# Altium PCB AIRZAI_LED_SENSE_FLEX_REVB.PcbDoc (part 1 of 2)
Units mil, origin at the board's own origin, x right, y up, seen from the top; angles counter-clockwise.
Board outline 2713.44 x 4393.69 mil, 2 copper layers (Top Layer, Bottom Layer); 53 components, 36 nets, 162 pads, 79 vias.
Unrouted connection lines stored in the file: 83.
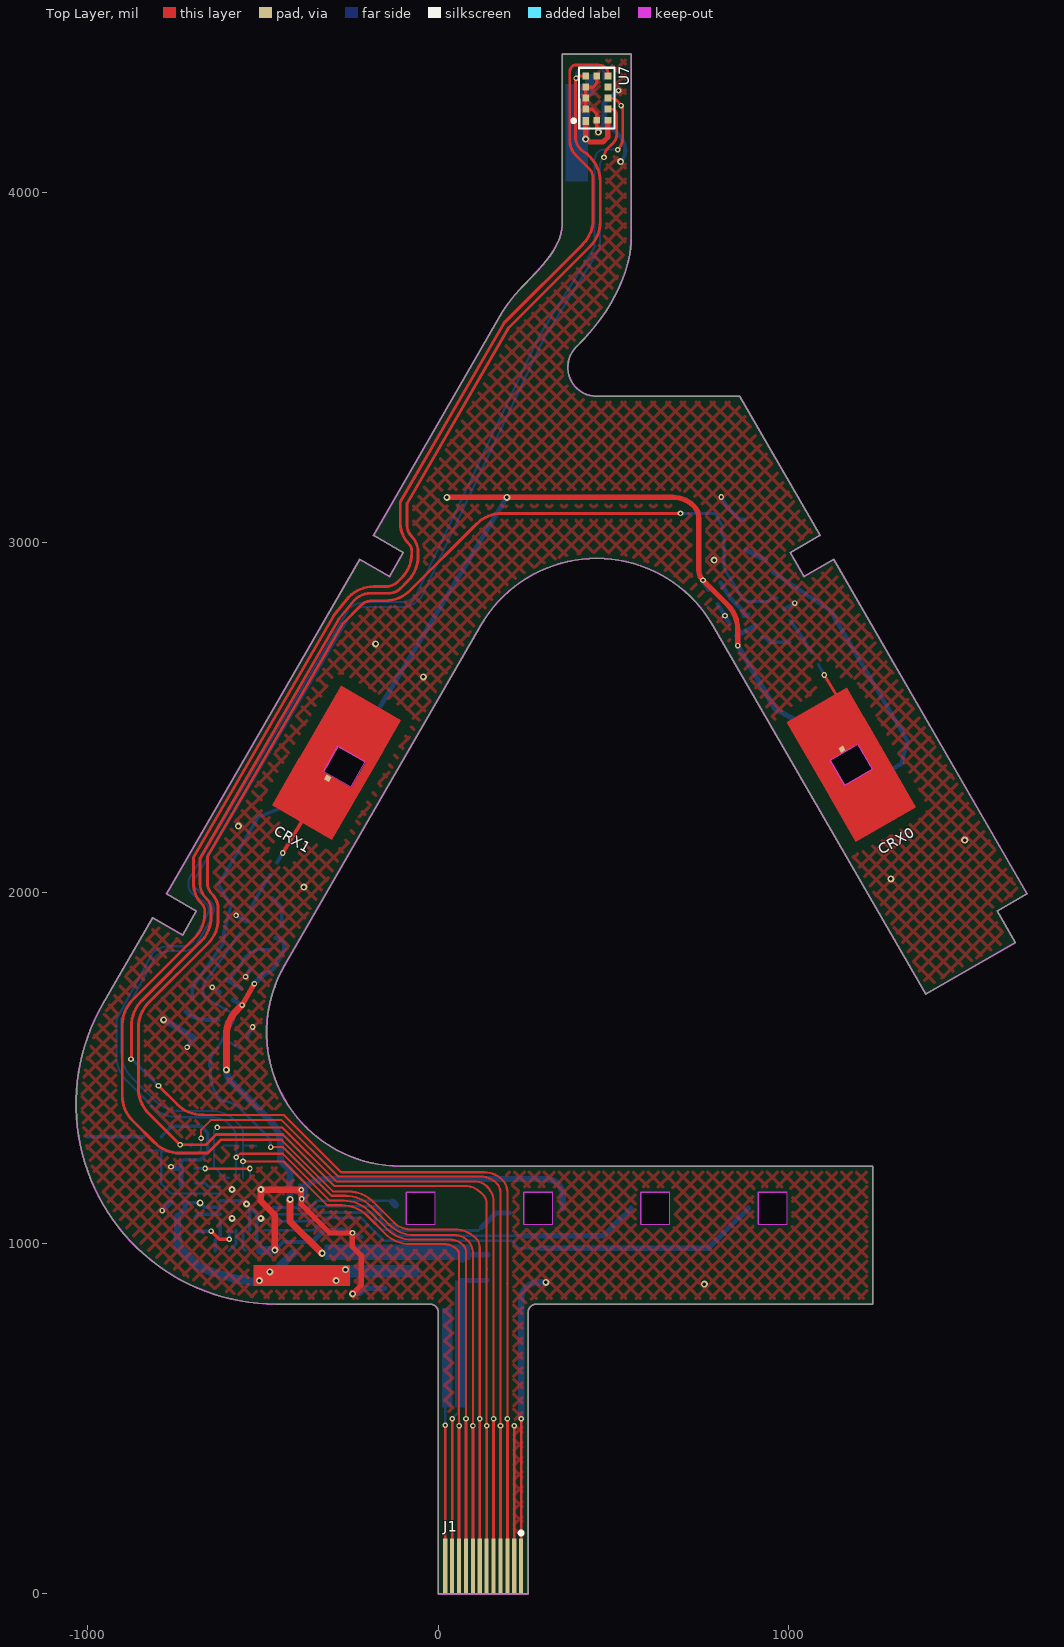
[diagram p0: Top Layer view]
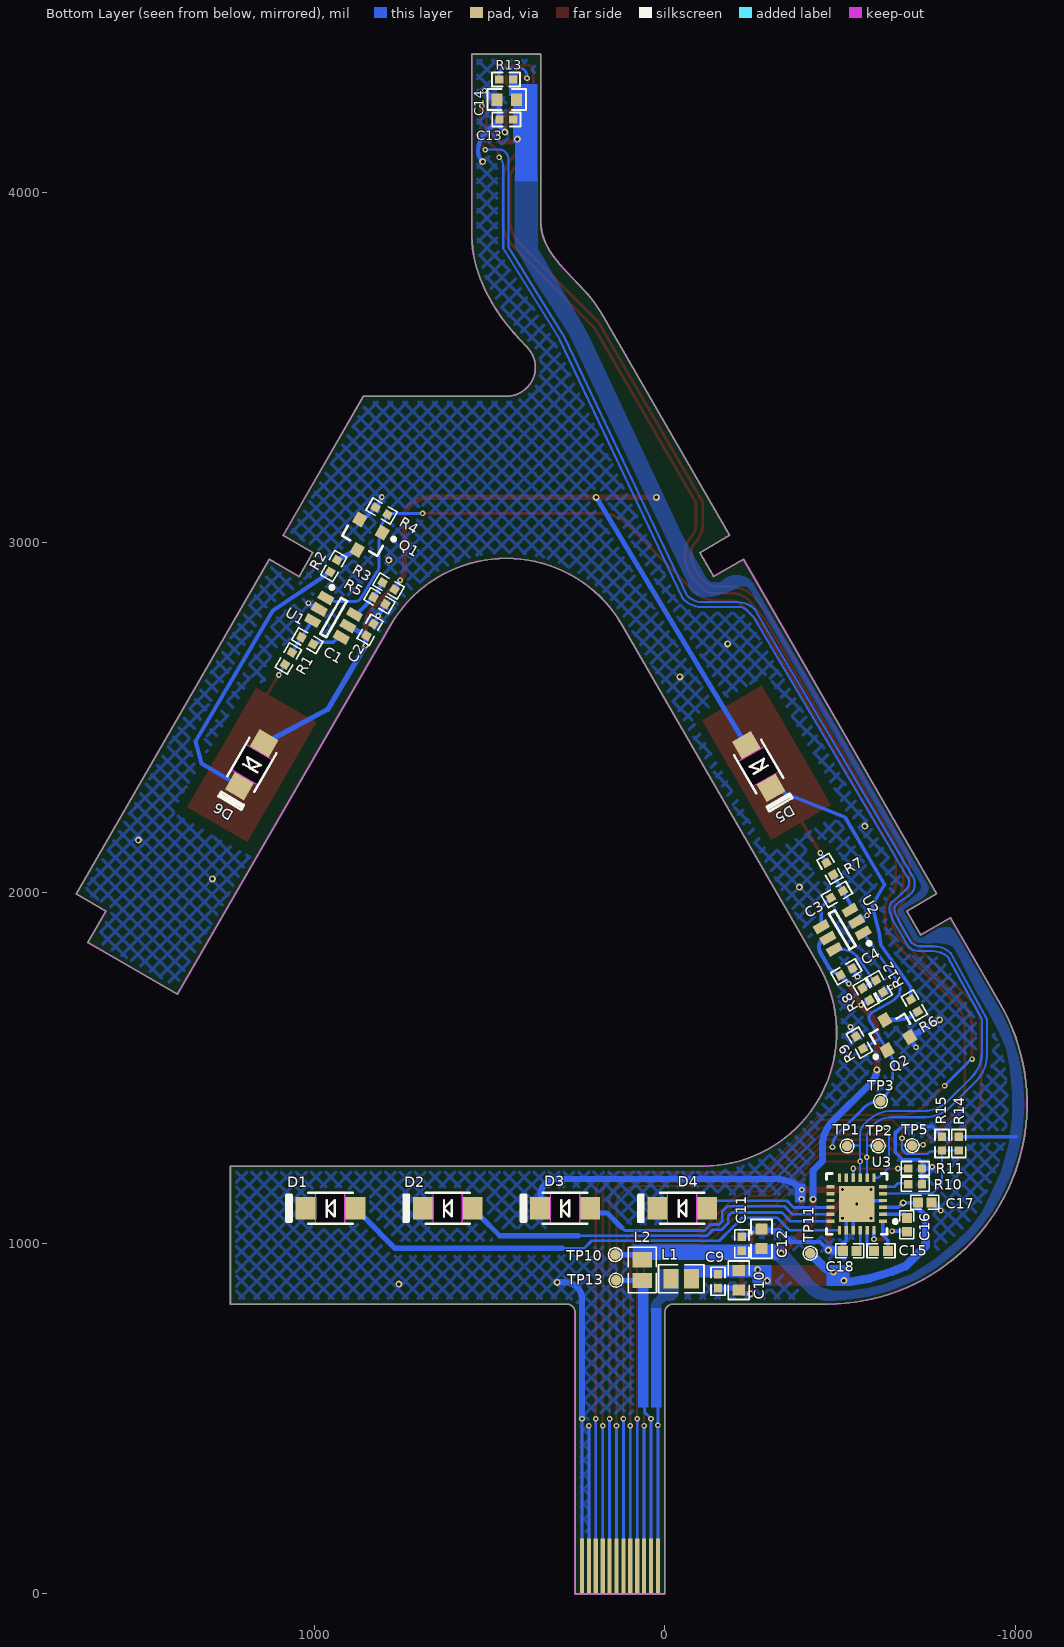
[diagram p1: Bottom Layer view, seen from below]
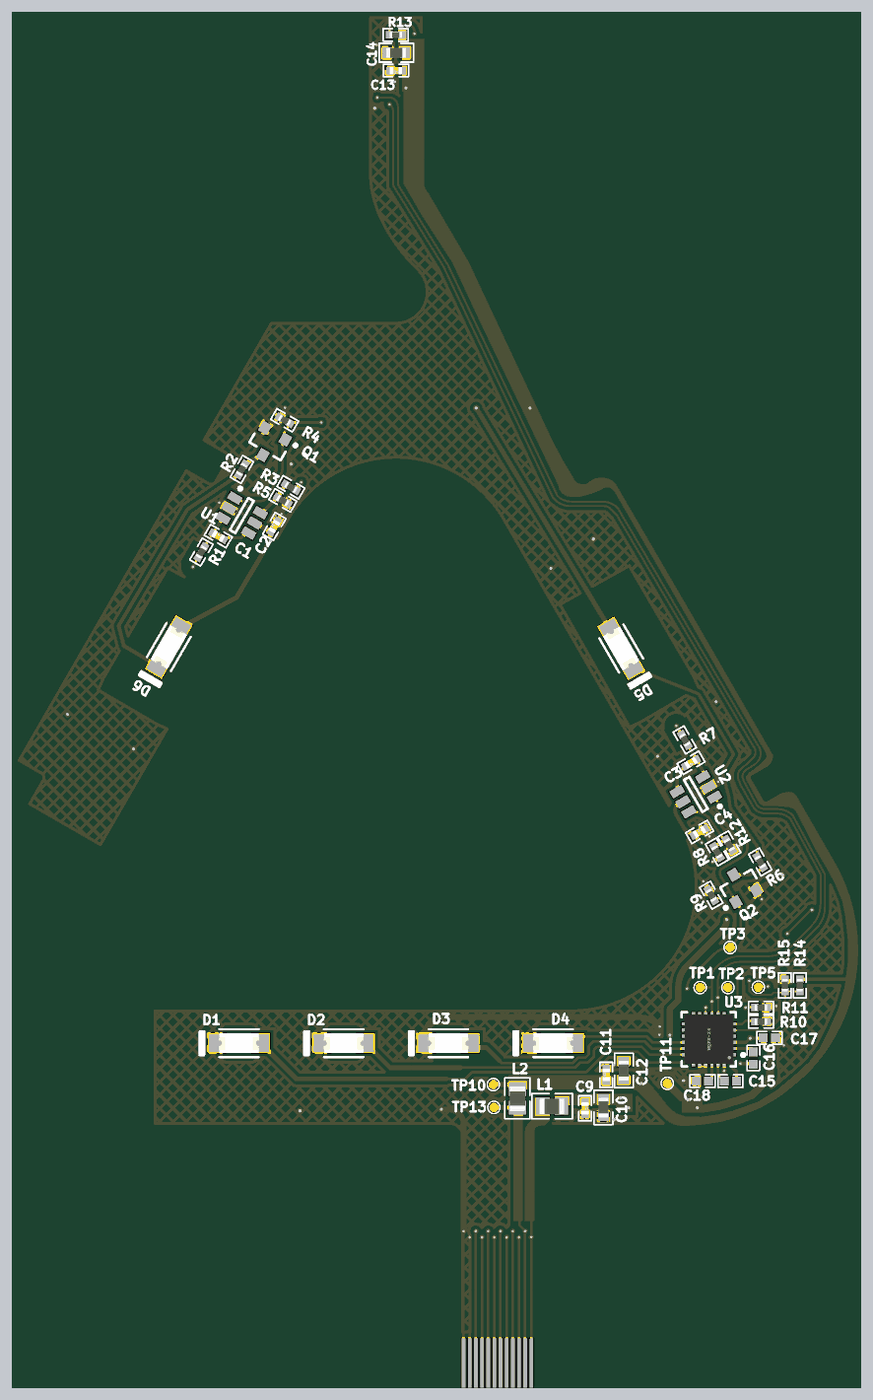
[diagram p3: 3D render of the assembled board from below, using the file's embedded part models]

## Layer stack, top to bottom
Top Solder: solder mask 0.4, Solder Resist, Dk 3.5
Top Layer: signal copper 1.4
Dielectric 1: dielectric 12.6, FR-4, Dk 4.8
Bottom Layer: signal copper 1.4
Bottom Solder: solder mask 0.4, Solder Resist, Dk 3.5

## Board outline
-463,826.78 cw(c-462.98,1397.65) -957.36,1683.09 -815.14,1929.41 -729.91,1880.19 -690.53,1948.38 -775.77,1997.6 -224.58,2952.23 -139.35,2903.01 -99.97,2971.2 -185.21,3020.41 182.62,3657.47 cw(c465.09,3488.64) 220.1,3708.36 cw(c839.65,3165.01) 242.17,3732.54 264.96,3756.39 ccw(c-627.68,4615.35) 287.35,3780.27 ccw(c-93.59,4128.16) 308.19,3804.57 ccw(c73.79,3993.55) 326.37,3829.65 ccw(c158.18,3938.86) 340.75,3855.9 ccw(c204.05,3917.92) 350.2,3883.68 ccw(c222.06,3913.41) 353.61,3913.38 353.61,3952.75 353.61,4393.69 550.46,4393.69 550.46,3952.74 550.46,3874 cw(c239.31,3875.17) 542.24,3804.11 cw(c183.5,3887.15) 532.52,3769.79 cw(c138.88,3902.12) 519.55,3736.13 cw(c91.77,3922.61) 503.7,3703.33 cw(c24.31,3959.43) 464.84,3641.1 cw(c-49.74,4012.89) 394.16,3559.04 ccw(c452.02,3499.99) 452.02,3417.31 860.08,3417.3 1089.23,3020.38 1003.99,2971.17 1043.36,2902.98 1128.6,2952.19 1679.74,1997.53 1594.5,1948.32 1646.29,1858.61 1390.38,1711.31 782.73,2763.85 ccw(c452,2572.92) 121.28,2763.87 -439.1,1793.32 ccw(c-108.38,1602.36) -108.39,1220.47 1239.37,1220.44 1239.37,826.77 279.66,826.77 ccw(c279.78,802.89) 255.91,802.77 255.91,0 0,0 0,802.41 ccw(c-23.88,802.89) -23.39,826.77
cut-out: 912.59,1055.11 995.26,1055.11 995.26,1145.66 912.59,1145.66
cut-out: 577.94,1055.12 660.62,1055.12 660.62,1145.67 577.94,1145.67
cut-out: 243.3,1055.12 325.97,1055.12 325.97,1145.67 243.3,1145.67
cut-out: -91.36,1055.12 -8.68,1055.12 -8.68,1145.67 -91.36,1145.67
cut-out: 1159.59,2307.55 1118.49,2378.93 1196.97,2424.11 1238.06,2352.73
cut-out: -327.65,2347.93 -249.18,2302.74 -208.08,2374.12 -286.55,2419.3

## Design rules (kind name [scope] priority, off if disabled: settings)
Clearance Clearance_Board_Cutout_Electrodes [(InComponent('CRX0') OR InComponent('CRX1')) vs OnLayer('Multi-Layer')] p1: gap=0 ignorepadtopadclearanceinfootprint=FALSE
Clearance Clearance_Board_Cutout_Diodes [(InComponent('D1') OR InComponent('D2') OR InComponent('D3') OR InComponent('D4') OR InComponent('D5') OR InComponent('D6')) vs OnLayer('Multi-Layer')] p2: gap=0 ignorepadtopadclearanceinfootprint=FALSE
Clearance Clearance_Keepout [(OnLayer('Keep-Out Layer')) vs (InComponent('D1') OR InComponent('D2') OR InComponent('D3') OR InComponent('D4') OR InComponent('D5') OR InComponent('D6') OR InComponent('CRX0') OR InComponent('CRX1') OR InComponent('J1'))] p3: gap=0 ignorepadtopadclearanceinfootprint=FALSE
Clearance Clearance_GND_POLY_ELECTRODE [(InComponent('CRX0') OR InComponent('CRX1') OR InComponent('CRX2') OR InNet('NetCRX0_1') OR InNet('NetCRX1_1') OR InNet('NetCRX2_1') OR InNet('NetR4_2') OR InNet('NetR2_1') OR InNet('NetR1_1')) vs (InNet('GND') AND InPolygon)] p4: gap=30 ignorepadtopadclearanceinfootprint=FALSE
Clearance Clearance_POLYGON_KEEPOUT [(OnLayer('Keep-Out Layer')) vs (InNet('GND') AND InPolygon)] p5: gap=10 ignorepadtopadclearanceinfootprint=FALSE
Clearance Clearance_GND_POLY_REST [All vs (InNet('GND') AND InPolygon)] p6: gap=10 ignorepadtopadclearanceinfootprint=FALSE
Clearance [All] p7: gap=6 ignorepadtopadclearanceinfootprint=FALSE
MinimumSolderMaskSliver [All] p1: minsoldermaskwidth=1
PolygonConnect [All] p1: connectstyle=Direct reliefconductorwidth=10 reliefentries=4 polygonreliefangle="90 Angle" airgapwidth=10
RoomDefinition AIRZAI_LED_SENSE_FLEX_REVB [InComponentClass('AIRZAI_LED_SENSE_FLEX_REVB')] p1: confinementstyle=ConfineIn formatcopy=TRUE lockcomponents=FALSE outline -3892.14,-2713.97 10767.86,-2713.97 10767.86,6886.03 -3892.14,6886.03
RoutingVias [All] p1: holewidth=28 width=50 viastyle="Through Hole" minholewidth=8 minwidth=16 maxholewidth=28 maxwidth=50
SilkToSilkClearance [All] p1: silktosilkclearance=1
SilkToSolderMaskClearance [IsPad] p1: minsilkscreentomaskgap=2 clearancetoexposedcopper=TRUE
SolderMaskExpansion [All] p1: expansion=4
UnRoutedNet [All] p1: checkbadconnections=TRUE
Width [All] p1: maxlimit=100 minlimit=6 preferedwidth=10
26 further rules are at their usual default settings.

## Components (designator, comment, footprint, x,y, rotation, side; value= is the part's Value field where it differs from the comment)
C1 "22nF" 0402CAP 1020,2720 r210 bottom
C2 "0.1µF" 0402CAP 841,2751 r120 bottom
C3 "22nF" 0402CAP -491,1996 r330 bottom
C4 "0.1µF" 0402CAP -518.16,1775.08 r150 bottom
C9 "0.1µF" 0402CAP -152,892.17 r270 bottom
C10 "10µF" 0603 -211,895 r270 bottom
C11 "0.1µF" 0402CAP -220,999.22 r90 bottom
C12 "10µF" 0603 -276,1013 r90 bottom
C13 "0.1µF" 0402CAP 452.01,4207.25 r0 bottom
C14 "4.7µF" 0603 451,4264 r180 bottom
C15 "CAP 1uF 16V 0402(1005)" CAPC0402(1005)60_M -616.69,979 r0 bottom value=1uF
C16 "CAP 1uF 16V 0402(1005)" CAPC0402(1005)60_M -690.55,1053.06 r270 bottom value=1uF
C17 "CAP 1uF 16V 0402(1005)" CAPC0402(1005)60_M -741.73,1117.23 r0 bottom value=1uF
C18 "CAP 1uF 16V 0402(1005)" CAPC0402(1005)60_M -527.69,979 r0 bottom value=1uF
CRX0 "CONTACT POINT 1" "CONTACT_POINT_1CM _SQ - duplicate" 1178.28,2365.83 r300 top
CRX1 "CONTACT POINT 1" "CONTACT_POINT_1CM _SQ" -290.35,2372.21 r60 top
D1 "WHITE" LED1206_LTW-C230DS 953.93,1100.39 r0 bottom locked
D2 "WHITE" LED1206_LTW-C230DS 619.28,1100.4 r0 bottom locked
D3 "WHITE" LED1206_LTW-C230DS 284.63,1100.41 r0 bottom locked
D4 "WHITE" LED1206_LTW-C230DS -50.03,1100.42 r0 bottom
D5 "WHITE" LED1206_LTW-C230DS -267.86,2361.02 r240 bottom
D6 "WHITE" LED1206_LTW-C230DS 1178.28,2365.83 r300 bottom
J1 "FFC Pads" FFC_PADS 127.95,78.74 r0 top locked
L1 "CB2012T100KR" 0805 -47,899 r180 bottom value=10uH
L2 "CB2012T100KR" 0805 64,924 r90 bottom value=10uH
Q1 "NTR4003NT1G" SOT-23-3-NTR4003NT1G 858,3013 r300 bottom
Q2 "NTR4003NT1G" SOT-23-3-NTR4003NT1G -647,1604 r60 bottom
R1 "10k 0402(1005)" 0402 1074,2669 r300 bottom value=10k
R2 "100R 0402(1005)" 0402 944.64,2933 r300 bottom value=100
R3 "Jumper 0402(1005)" 0402 788.11,2876 r210 bottom value=0R
R4 "DNP 0402(1005)" 0402 808,3090 r30 bottom value=DNP
R5 "DNP 0402(1005)" 0402 814,2834 r210 bottom value=DNP
R6 "100R 0402(1005)" 0402 -712,1679.08 r60 bottom value=100
R7 "10k 0402(1005)" 0402 -471,2069 r60 bottom value=10k
R8 "Jumper 0402(1005)" 0402 -574.02,1711 r240 bottom value=0R
R9 "DNP 0402(1005)" 0402 -555.51,1573 r60 bottom value=DNP
R10 "Jumper 0402(1005)" 0402 -714.57,1168.99 r0 bottom value=0R
R11 "Jumper 0402(1005)" 0402 -714.57,1213.99 r0 bottom value=0R
R12 "DNP 0402(1005)" 0402 -613,1734 r240 bottom value=DNP
R13 "10k 0402(1005)" 0402 453,4321 r0 bottom value=10k
R14 "Jumper 0402(1005)" 0402 -838.76,1285 r270 bottom value=0R
R15 "DNP 0402(1005)" 0402 -790.88,1285 r90 bottom value=DNP
TP1 "Test Point" TP_0.9MM -520.09,1278 r90 bottom
TP2 "Test Point" TP_0.9MM -608.92,1278 r90 bottom
TP3 "Test Point" TP_0.9MM -615.68,1406 r90 bottom
TP5 "Test Point" TP_0.9MM -706,1279 r90 bottom
TP10 "Test Point" TP_0.9MM 141,968 r90 bottom
TP11 "Test Point" TP_0.9MM -415,972 r90 bottom
TP13 "Test Point" TP_0.9MM 139,895 r90 bottom
U1 "AT42QT1010-TSHR" SOT-23-6-AT42QT1010-TSHR 944.94,2785.89 r210 bottom
U2 "AT42QT1010-TSHR" SOT-23-6-AT42QT1010-TSHR -506.3,1895 r330 bottom
U3 "LP55231SQE/NOPB" WQFN-24-LP55231SQE/NOPB -547.74,1112.61 r0 bottom value="IC LED DRIVER RGLTR DIM 24WQFN"
U7 "VL53L0CXV0DH/1" VL53L0X 452,4268 r270 top

## Footprints (in the part's own frame and the unit in brackets; to place one, negate y for a bottom-side part, rotate by r counter-clockwise, add the part's x,y. Pads: shape width x height; smd on the part's side, far side on the other; paste and mask are expansions set on the pad)
0402 [mm] "Chip Resistor, Body 1.1x0.5mm, IPC High Density"
  rect 0.6x0.6 smd: 1(-0.5,0) 2(0.5,0)
  silkscreen extent -1.02,-0.51 1.02,0.51, body extent -0.5,-0.25 0.5,0.25, height 0.27
0402CAP [mm] "Chip Capacitor, Body 1.1x0.5mm, IPC High Density"
  rect 0.6x0.6 smd: 1(-0.5,0) 2(0.5,0)
  silkscreen extent -1.02,-0.51 1.02,0.51, body extent -0.5,-0.3 0.5,0.3, height 0.19
0603 [mm] "Chip Resistor, Body 1.6x0.8mm, IPC High Density"
  rect 0.8x0.9 smd: 1(-0.7,0) 2(0.7,0)
  silkscreen extent -1.4,-0.76 1.4,0.76, body extent -0.8,-0.41 0.8,0.4, height 0.37
0805 [mm] "Chip Resistor, Body 2.0x1.3mm, IPC High Density"
  rect 1.1x1.4 smd: 1(-0.75,0) 2(0.75,0)
  silkscreen extent -1.65,-1.02 1.65,1.02, body extent -1.02,-0.64 0.98,0.62, height 0.47
CAPC0402(1005)60_M [mm] "Chip Capacitor, Body 1.0x0.5mm, Height 0.6mm, IPC Low Density"
  rect 0.72x0.72 smd: 1(-0.5,0) 2(0.5,0)
  silkscreen extent -1.02,-0.51 1.02,0.51, body extent -0.55,-0.3 0.55,0.3, height 0.6
"CONTACT_POINT_1CM _SQ" [mm]
  rect 0.4x0.4 smd paste-2 mask-2: 1(-1.312,-0.018)
  Top Layer region: -3.216,2.5 -1.068,0.472 1.05,0.472 1.05,-2.5 5,-2.5 5,2.5
  Top Layer region: 2.48,-2.5 1.768,-1.828 -1.05,-1.828 -1.05,2.5 -5,2.5 -5,-2.5
"CONTACT_POINT_1CM _SQ - duplicate" [mm]
  rect 0.4x0.4 smd paste-2 mask-2: 1(-1.312,-0.018)
  Top Layer region: 2.48,-2.5 1.05,-1.15 -1.05,-1.15 -1.05,2.5 -5,2.5 -5,-2.5
  Top Layer region: -2.48,2.5 -1.05,1.15 1.05,1.15 1.05,-2.5 5,-2.5 5,2.5
FFC_PADS [mm] "(0.50mm"
  rect 0.3x4 smd: 1(2.75,0) 2(2.25,0) 3(1.75,0) 4(1.25,0) 5(0.75,0) 6(0.25,0) 7(-0.25,0) 8(-0.75,0) 9(-1.25,0) 10(-1.75,0) 11(-2.25,0) 12(-2.75,0)
  rect 0.3x4 smd far side: 1(2.75,0) 2(2.25,0) 3(1.75,0) 4(1.25,0) 5(0.75,0) 6(0.25,0) 7(-0.25,0) 8(-0.75,0) 9(-1.25,0) 10(-1.75,0) 11(-2.25,0) 12(-2.75,0)
  silkscreen extent 2.63,2.29 2.87,2.54
LED1206_LTW-C230DS [mm] "Chip Capacitor, Body 3.2x1.6mm, IPC High Density"
  rect 1.5x1.6 smd paste-0.1 mask+0.07: 1(1.775,0) 2(-1.775,0)
  silkscreen extent -1.6,-1.13 3.19,1.13, body extent -1.63,-0.8 1.63,0.8, height 0.31
SOT-23-3-NTR4003NT1G [mm] "SOT23, 3-Leads, Body 2.92x1.3mm, Pitch 0.95mm"
  rect 0.9x0.8 smd: 1(-1,0.95) 2(-1,-0.95) 3(1,0)
  silkscreen extent -1.12,-1.46 0.65,2.02, body extent -0.65,-1.46 0.65,1.46, height 1.11
SOT-23-6-AT42QT1010-TSHR [mm] "SOT23, 6-Leads, Body 2.9x1.6mm, Pitch 0.95mm, Lead Span 2.8mm, IPC Medium Density"
  rect 1.1x0.65 smd: 1(-1.2,0.95) 2(-1.2,0) 3(-1.2,-0.95) 4(1.2,-0.95) 5(1.2,0) 6(1.2,0.95)
  silkscreen extent -1.32,-1.5 0.25,1.95, body extent -0.88,-1.5 0.88,1.5, height 1.45
TP_0.9MM [mm] "0.9MM DIA TESTPOINT"
  round 0.75 smd paste-5 mask+0.05: 1(0,0)
  silkscreen extent -0.5,-0.5 0.5,0.5
VL53L0X [mm]
  rect 0.58x0.5 smd: 1(1.64,-0.8)
  rect 0.5x0.5 smd: 2(0.8,-0.8) 3(0,-0.8) 4(-0.8,-0.8) 5(-1.6,-0.8) 6(-1.6,0) 7(-1.6,0.8) 8(-0.8,0.8) 9(0,0.8) 10(0.8,0.8) 11(1.6,0.8) 12(1.6,0)
  silkscreen extent -2.2,-1.79 2.2,1.3, body extent -2.2,-1.3 2.2,1.3, height 3.72
WQFN-24-LP55231SQE/NOPB [mm] "QFN, 24-Leads, Body 3.97x3.97mm, Pitch 0.50mm, Thermal Pad 2.60x2.60mm, IPC Medium Density"
  rect 0.6x0.25 smd: 1(-1.9,1.25) 2(-1.9,0.75) 3(-1.9,0.25) 4(-1.9,-0.25) 5(-1.9,-0.75) 6(-1.9,-1.25) 13(1.9,-1.25) 14(1.9,-0.75) 15(1.9,-0.25) 16(1.9,0.25) 17(1.9,0.75) 18(1.9,1.25)
  rect 0.25x0.6 smd: 7(-1.25,-1.9) 8(-0.75,-1.9) 9(-0.25,-1.9) 10(0.25,-1.9) 11(0.75,-1.9) 12(1.25,-1.9) 19(1.25,1.9) 20(0.75,1.9) 21(0.25,1.9) 22(-0.25,1.9) 23(-0.75,1.9) 24(-1.25,1.9)
  rect 2.6x2.6 smd: 25(0,0)
  silkscreen extent -2.92,-2.2 2.2,2.2, body extent -2.01,-2.01 2.01,2.01, height 0.8

## Part data
C1 C3: library part C0402-100n, "Capacitor, X7R, ±10%", Case/Package=0402, Case Code (Metric)=1005, Dielectric=X7R, Manufacturer=TDK, Manufacturer Part Number=CGA2B2X7R1E223K050BA, Max Operating Temperature=125°C, Min Operating Temperature=-55°C, Package Quantity=1, Ratings=AEC-Q200, Supplier Part Number 1=445-5609-1-ND, Tolerance=10%, Voltage Rating=25V, Capacitance=22nF, Case Code (Imperial)=0402, ComponentLink1Description=http://www.mouser.com/ds/2/281/c02e-2905.pdf?src-supplier=Mouser, ComponentLink1URL=http://www.mouser.com/ds/2/281/c02e-2905.pdf?src-supplier=Mouser, ComponentLink2Description=http://psearch.en.murata.com/capacitor/product/GRM155R71H333KE14%23.pdf?src-supplier=Avnet, ComponentLink2URL=http://psearch.en.murata.com/capacitor/product/GRM155R71H333KE14%23.pdf?src-supplier=Avnet, ComponentLink3Description=http://search.murata.co.jp/Ceramy/image/img/A01X/G101/ENG/GRM155R71H333KE14-01.pdf?src-supplier=Digi-Key, ComponentLink3URL=http://search.murata.co.jp/Ceramy/image/img/A01X/G101/ENG/GRM155R71H333KE14-01.pdf?src-supplier=Digi-Key, ComponentLink4Description=https://datasheet.ciiva.com/24220/cga2b2x7r1e223k050ba-265693-24220032.pdf?src-supplier=Mouser, ComponentLink4URL=https://datasheet.ciiva.com/24220/cga2b2x7r1e223k050ba-265693-24220032.pdf?src-supplier=Mouser, ComponentLink5Description=https://datasheet.ciiva.com/7975/1807242-7975269.pdf?src-supplier=Element14, ComponentLink5URL=https://datasheet.ciiva.com/7975/1807242-7975269.pdf?src-supplier=Element14, Composition=Ceramic, Depth=0.5mm, Height=0.5mm, Length=1mm, Mount="Surface Mount", Packaging="Tape and Reel", Pricing 1="1 = 0.10000, 10 = 0.06500, 100 = 0.02910, 500 = 0.02080, 1000 = 0.01635, 2500 = 0.01486, 5000 = 0.01367 (USD)", REACH SVHC="No SVHC", RoHS=Yes, Stock 1=499669, Supplier 1=Digi-Key, Termination=SMD/SMT, Thickness=0.022inch, Voltage Rating (DC)=25V, Weight=2.3E-05oz, Width=0.5mm
C2 C4 C9 C11 C13: library part C0402-100n, "Capacitor, X7R, ±10%", Case-EIA=0402, Case-Metric=1005, Manufacturer=TDK, Manufacturer Part Number=C1005X7R1C104K, Rated Voltage="16 V", Supplier Part Number 1=445-4952-2-ND, Tolerance=±20%, Max Thickness="0.6 mm", Note="16V ±10% X7R", Pin Count=2, Supplier 1=Digi-Key, Technology=SMT
C10 C12: library part C0402-100n, "Capacitor, X7R, ±10%", Case-EIA=0603, Case-Metric=1608, Manufacturer=MURATA, Manufacturer Part Number=GRM188R60J106ME47D, Rated Voltage="6.3 V", Supplier Part Number 1=490-3896-6-ND, Tolerance=±20%, Max Thickness="0.9 mm", Note="6.3volts X5R 20%", Pin Count=2, Supplier 1=Digi-Key, Technology=SMT
C14: library part "C0603-1µ0 X7R", "Capacitor, X7R, ±10%", Case-EIA=0402, Case-Metric=1005, Manufacturer=TDK, Manufacturer Part Number=C1005X5R0J475M, Rated Voltage="6.3 V", Supplier Part Number 1=445-7395-2-ND, Tolerance=±20%, Max Thickness="0.6 mm", Note="6.3volts X5R 20%", Supplier 1=Digi-Key, Technology=SMT
C15 C16 C17 C18: library part CAP, "CAP 1uF 16V ±10% 0402 (1005 Metric) Thickness 0.6mm SMD", Case-EIA=0402, Case-Metric=1005, Manufacturer="Taiyo Yuden", Manufacturer Part Number=JMK105C6105KV-F, Rated Voltage="6.3 V", Supplier Part Number 1=587-3381-1-ND, Tolerance=±10%, Max Thickness="0.6 mm", Note="CAP CER 1UF 6.3V X6S 0402", Pin Count=2, Supplier 1=Digi-Key, Technology=SMT
CRX0 CRX1: library part WIRE_POINT
D1 D2 D3 D4 D5 D6: library part LED_LTW-C230DS, Case-EIA=1206, Case-Metric=3216, Manufacturer=LITEON, Manufacturer Part Number=LTW-C230DS, Supplier Part Number 1=160-2221-1-ND, Max Thickness=1.10mm, Note="REVERSE MOUNT CHIP LED", Supplier 1=Digi-Key
J1: library part FFC_PADS, "0.5 mm Pitch FFC Pads", ComponentLink1URL=http://www.molex.com/molex/index.jsp, ComponentLink2Description=Datasheet, ComponentLink2URL=http://www.molex.com/webdocs/datasheets/pdf/en-us/0528921233_FFC_FPC_CONNECTORS.pdf, ComponentLink3Description="Package Specification", ComponentLink3URL=http://www.molex.com/pdm_docs/sd/528921233_sd.pdf, Note=DNP
L1 L2: "Inductor, 10 µH, 0.5A, 0.65 ohm, SMD", Case/Package=0805, Case Code (Metric)=2012, Current Rating=520mA, DC Resistance (DCR)=500mR, Inductance=10uH, Inductance Tolerance=10%, Manufacturer="Taiyo Yuden", Max DC Current=200mA, Max Operating Temperature=105°C, Min Operating Temperature=-40°C, Package Quantity=3000, Self Resonant Frequency=32MHz, Supplier Part Number 1=587-2452-1-ND, Test Frequency=2.52MHz, Value1="0.65 ohm", Value2=0.5A, ValueDisplayed=10µH, Case Code (Imperial)=0805, ComponentLink1Description="Datasheet link", ComponentLink1URL=http://www.yuden.co.jp/ut/product/category/inductor/BRC2012T2R2MD.pdf, ComponentLink2Description=https://datasheet.ciiva.com/1040/cb2012t100kr-ss-1040384.pdf?src-supplier=Digi-Key, ComponentLink2URL=https://datasheet.ciiva.com/1040/cb2012t100kr-ss-1040384.pdf?src-supplier=Digi-Key, Composition=Wirewound, Core Material=Ferrite, Halogen Free="Halogen Free", Height=1.25mm, Height - Seated (Max)=0.057inch, Lead Free="Lead Free", Length=0.079inch, Manufacturer Part Number=CB2012T100KR, Mount="Surface Mount", Number of Pins=2, Packaging="Tape and Reel", PartNumber=CB2012T100KR, Pricing 1="1 = 0.23000, 10 = 0.20700, 100 = 0.14230, 500 = 0.12162, 1000 = 0.09315 (USD)", REACH SVHC=Unknown, RoHS=Yes, Saturation Current=200mA, Shielding=Unshielded, Stock 1=18059, Supplier 1=Digi-Key, Technology=Wirewound, Termination=SMD/SMT, Tolerance=10%, Width=0.049inch
Q1 Q2: "N-Channel 30V 500mA (Ta) 690mW (Ta) Surface Mount SOT-23-3 (TO-236)", Case/Package=SOT-23-3, Continuous Drain Current (ID)=500mA, Drain to Source Breakdown Voltage=30V, Drain to Source Resistance=1R, Gate to Source Voltage (Vgs)=20V, Input Capacitance=21pF, Manufacturer="ON Semiconductor", Max Operating Temperature=150°C, Max Power Dissipation=690mW, Min Operating Temperature=-55°C, Package Quantity=1, Supplier Part Number 1=NTR4003NT1GOSCT-ND, Threshold Voltage=1.4V, ComponentLink1Description="Manufacturer URL", ComponentLink1URL=http://www.onsemi.com/, ComponentLink2Description=Datasheet, ComponentLink2URL=http://www.onsemi.cn/pub_link/Collateral/NTR4003N-D.PDF, ComponentLink3Description="Package Specification", ComponentLink3URL=http://www.onsemi.cn/pub_link/Collateral/318-08.PDF, ComponentLink4Description=https://datasheet.ciiva.com/5751/86005-5751936.pdf?src-supplier=Farnell, ComponentLink4URL=https://datasheet.ciiva.com/5751/86005-5751936.pdf?src-supplier=Farnell, ComponentLink5Description=https://datasheet.ciiva.com/26144/ntr4003n-d-26144544.pdf?src-supplier=Avnet+Europe, ComponentLink5URL=https://datasheet.ciiva.com/26144/ntr4003n-d-26144544.pdf?src-supplier=Avnet+Europe, ComponentLink6Description=https://datasheet.ciiva.com/30479/0900766b8120606c-30479654.pdf?src-supplier=RSComponents, ComponentLink6URL=https://datasheet.ciiva.com/30479/0900766b8120606c-30479654.pdf?src-supplier=RSComponents, ComponentLink7Description=https://datasheet.ciiva.com/30479/0900766b8120606c-30479655.pdf?src-supplier=RSComponents, ComponentLink7URL=https://datasheet.ciiva.com/30479/0900766b8120606c-30479655.pdf?src-supplier=RSComponents, ComponentLink8Description=https://datasheet.ciiva.com/936/ntr4003n-d-936807.pdf?src-supplier=Digi-Key, ComponentLink8URL=https://datasheet.ciiva.com/936/ntr4003n-d-936807.pdf?src-supplier=Digi-Key, ComponentLink9Description=https://datasheet.ciiva.com/8114/ntr4003n-d-8114935.pdf?src-supplier=Avnet, ComponentLink9URL=https://datasheet.ciiva.com/8114/ntr4003n-d-8114935.pdf?src-supplier=Avnet, ComponentLink10Description=https://datasheet.ciiva.com/936/ntr4003n-d-936808.pdf?src-supplier=Digi-Key, ComponentLink10URL=https://datasheet.ciiva.com/936/ntr4003n-d-936808.pdf?src-supplier=Digi-Key, ComponentLink11Description=https://datasheet.ciiva.com/936/ntr4003n-d-936809.pdf?src-supplier=Digi-Key, ComponentLink11URL=https://datasheet.ciiva.com/936/ntr4003n-d-936809.pdf?src-supplier=Digi-Key, ComponentLink12Description=https://datasheet.ciiva.com/8059/86005-8059403.pdf?src-supplier=Element14, ComponentLink12URL=https://datasheet.ciiva.com/8059/86005-8059403.pdf?src-supplier=Element14, ComponentLink13Description=https://datasheet.ciiva.com/8059/86005-8059404.pdf?src-supplier=Element14, ComponentLink13URL=https://datasheet.ciiva.com/8059/86005-8059404.pdf?src-supplier=Element14, ComponentLink14Description=https://datasheet.ciiva.com/22656/86005-22656046.pdf?src-supplier=Farnell, ComponentLink14URL=https://datasheet.ciiva.com/22656/86005-22656046.pdf?src-supplier=Farnell, Contact Plating=Tin, Element Configuration=Single, Fall Time=47.9ns, Height=1.01mm, Lead Free="Lead Free", Length=3.04mm, Manufacturer Part Number=NTR4003NT1G, Nominal Vgs=1.4V, Number of Elements=1, Number of Pins=3, On-State Resistance=1R, Packaging="Tape and Reel", Power Dissipation=690mW, Pricing 1="1 = 0.30000, 10 = 0.27200, 100 = 0.15230, 500 = 0.08160, 1000 = 0.05548 (USD)", Radiation Hardening=No, Rds On Max=1.5R, REACH SVHC="No SVHC", Rise Time=47.9ns, RoHS=Yes, Stock 1=83954, Supplier 1=Digi-Key, Turn-Off Delay Time=65.1ns, Turn-On Delay Time=16.7ns, Width=1.4mm
R1 R7 R13: library part RES, "10k 0.063W 1% 0402 (1005 Metric)  SMD", Case-EIA=0402, Case-Metric=1005, Manufacturer=Yageo, Manufacturer Part Number=RC0402FR-0710KL, Power=0.063W, Supplier Part Number 1=311-10.0KLRCT-ND, Tolerance=None, Max Thickness="0.6 mm", Note="RES SMD 10K OHM 1% 1/16W 0402", Pin Count=2, Supplier 1=Digi-Key, Technology=SMT
R2 R6: library part RES, "100 0.063W 1% 0402 (1005 Metric)  SMD", Case-EIA=0402, Case-Metric=1005, Manufacturer=Yageo, Manufacturer Part Number=RC0402FR-07100RL, Power=None, Supplier Part Number 1=311-100LRCT-ND, Max Thickness="0.6 mm", Note="0.1W JUMPER", Pin Count=2, Supplier 1=Digi-Key, Technology=SMT, Tolerance=None
R3 R8 R10 R11 R14: library part RES, "Jumper 0402 (1005 Metric)", Case-EIA=0402, Case-Metric=1005, Manufacturer=Panasonic, Manufacturer Part Number=ERJ-2GE0R00X, Power=None, Supplier Part Number 1=P0.0JCT-ND, Max Thickness="0.6 mm", Note="0.1W JUMPER", Pin Count=2, Supplier 1=Digi-Key, Technology=SMT, Tolerance=None
R4 R5 R9 R12 R15: library part RES, "DNP", Case-EIA=0402, Case-Metric=1005, Power="0.0625 W", Tolerance=None, Manufacturer Part Number=DNP, Max Thickness="0.6 mm", Note=DNP, Pin Count=2, Supplier 1=Digi-Key, Supplier Part Number 1=DNP, Technology=SMT
U1 U2: "One-channel Touch Sensor IC with Reset Timer, -40° to +85° C, 6-pin SOT23", Supplier Part Number 1=AT42QT1010-TSHRCT-ND, Code_IPC=SOT26A-6, Code_JEDEC=MO-178-AB, ComponentLink1Description="Manufacturer URL", ComponentLink1URL=http://www.atmel.com/, ComponentLink2Description=Datasheet, ComponentLink2URL=http://www.atmel.com/Images/doc9541.pdf, DatasheetVersion="revH, May-2010", PackageDescription="6-Lead, 2.90 x 1.60 mm Plastic Small Outline Package (SOT23)", PackageReference=6ST1, PackageVersion="revA, Jun-2008", PartNumber=AT42QT1010-TSHR
U3: "Imported", Case-EIA=24-WQFN, Manufacturer=TI, Supplier Part Number 1=296-39059-1-ND, Tolerance=None, Built_By=EMA_UL_Team, C="Copyright (C) 2016 Accelerated Designs. All rights reserved", Manufacturer_Part_Number=LP55231SQE/NOPB, Manufacturer Part Number=LP55231SQE/NOPB, Note="IC LED DRIVER RGLTR DIM 24WQFN", RefDes=RefDes, Supplier 1=Digi-Key, Technology=SMT, Type=DEV, Vendor="Texas Instruments"
U7: library part VL53L0X, Case-EIA=LGA12, Manufacturer=ST, Supplier Part Number 1=497-16538-1-ND, Tolerance=None, Manufacturer Part Number=VL53L0CXV0DH/1, Note="SENSOR LASER DISTANCE TOF 2M", Supplier 1=Digi-Key, Technology=SMT

## Via types
v1: diameter 16, hole 8, Top Layer to Bottom Layer, tented both sides, 49 vias
v2: diameter 20, hole 10, Top Layer to Bottom Layer, tented both sides, 25 vias
v3: diameter 20, hole 8, Top Layer to Bottom Layer, 5 vias

## Nets (pads, with @x,y where several pads share a name; then routed paths per layer and width w, separated by ;. In a path a pad name is that pad's centre, name@x,y a point inside that pad or via, vN(x,y) a via of type N, cw(c..) or ccw(c..) an arc to the next point about the centre after c; other vN are vias at no path point)
3V3: C2.1 C4.1 C11.1 C12.1 C13.1 C14.2 D5.2 D6.2 L2.2 R3.2 R8.2 R13.1 R14.1 TP10.1 U1.5 U2.5 U7.1 U7.11 | length 4046.3
  Top Layer w15: v1(-560,1680) v1(-525.05,1741) ; v2(24,3129) 668.64,3129 cw(c668.64,3043.64) 729,3104 cw(c695.2,3070.2) 743,3070.2 743,2921.23 ccw(c783.97,2921.23) v1(755,2892.26) 824.71,2822.55 cw(c754,2751.84) 854,2751.84 v1(854,2706) ; U7.1@420.5,4203.43 v2(420.5,4151.32) 423.68,4151.32 432,4143 470,4143 483.5,4156.5 U7.11@483.5,4201.86
  Top Layer w20: v2(-605,1495) -605,1593.58 cw(c-505,1593.58) -575.71,1664.29 v1(-560,1680) ; v2(-423,1126) -423,1063 v2(-332,972)
  Bottom Layer w10: -1004,1305 -999,1305 -998.69,1304.69 R14.1@-838.76,1304.69
  Bottom Layer w12: C4.1@-504.11,1768.24 ccw(c-504.11,1810.11) -474.5,1780.5 -469,1786 -443,1831.47 -440,1842 -440,1845.99 ccw(c-465.39,1845.99) U2.5@-465.39,1871.38
  Bottom Layer w15: R8.2@-583.86,1693.95 v1(-560,1680) ; v1(-525.05,1741) -525.05,1741.65 -501.34,1765.36 C4.1@-501,1766 ; D5.2@-232.92,2421.54 v2(195.72,3129.17) ; L2.2@64,953.53 69.91,953.53 84.38,968 TP10.1@141,968 ; v1(755,2892.26) R3.2@771.06,2866.16 ; U1.5@904.03,2762.27 C2.1@850.84,2733.95 854,2730.79 v1(854,2706) 962,2524 D6.2@1143.34,2426.35
  Bottom Layer w20: v2(-605,1495) ccw(c-556.72,1495) -590.86,1460.86 -479.29,1349.29 cw(c-550,1278.58) -450,1278.58 -450,1235.77 -422.69,1208.46 -422.69,1126.31 v2(-423,1126)
+5V: C9.1 C10.1 C17.2 L1.2 TP11.1 U3.3 | length 634.2
  Bottom Layer w10: C17.2@-730.32,1115.77 -722.05,1115.77 -679.74,1115.77 -666.74,1102.77 U3.3@-622.54,1102.77
  Bottom Layer w15: -744.8,994.83 -743.8,993.83 ; -743.8,1078.55 -722.05,1100.3 -722.05,1115.77 C17.2@-722.05,1117.23
  Bottom Layer w20: -743.8,1016.44 -743.8,1078.55
  Bottom Layer w25: -743.8,1016.44 -743.8,993.83 -743.8,992.27 -686.76,935.24 -649,920 -583.14,900 -530,891 -477,892 ; v2(-481,919) -481,920 -474.5,926.5 -460.5,926.5 TP11.1@-415,972
  other v2: -511,894 -292,894 -265,925 -680.02,1116.05
CAP1_TOUCH_OUT: J1.6 Q1.1 R4.1 TP5.1 U1.1 | length 5736.1
  Top Layer w6: -444,1311 -297,1164 76,1164 cw(c76,1101.23) 120.38,1145.62 129,1137 cw(c107.77,1115.77) 137.8,1115.77 137.8,926.29 ; v1(137.8,480) 137.8,926.29 ; 138,926.5 137.8,926.29
  Top Layer w8: -444,1311 -634,1311 -652,1293 -652,1292.54 -662.94,1281.6 v1(-737,1281.6) -826.71,1371.31 cw(c-756,1442.02) -856,1442.02 -856,1616.15 cw(c-756,1616.15) -826.71,1686.86 -657.74,1855.84 ccw(c-728.45,1926.55) -628.45,1926.55 -628.45,1954.63 ccw(c-688.37,1954.63) -646,1997 cw(c-614.62,2028.38) -659,2028.38 -659,2103 -273.55,2767.9 -220.49,2820.96 cw(c-189,2789.47) -189,2834 -151.47,2834 ccw(c-151.47,2934) -80.76,2863.29 109.66,3053.71 cw(c180.37,2983) 180.37,3083 v1(691,3083) ; J1.6@137.8,78.74 v1(137.8,480)
  Bottom Layer w8: v1(-737,1281.6) -707.18,1281.6 -703.32,1285.47 cw(c-712.47,1285.47) TP5.1@-706,1279 ; J1.6@137.8,78.74 v1(137.8,480) ; v1(691,3083) 788.11,3083 R4.1@790.95,3080.16 810.66,3047.11 Q1.1@805.92,3028.39 cw(c783.19,3005.66) 815.34,3005.66 815.34,2932.03 ccw(c838.08,2932.03) 822,2915.95 869,2838.08 ccw(c883.39,2852.47) 883.39,2832.12 943.67,2832.12 953.46,2841.91 U1.1@967.16,2841.91
CAP2_TOUCH_OUT: J1.8 Q2.1 R9.1 TP3.1 U2.1 | length 2854.2
  Top Layer w6: v1(-478.49,1275) -443.97,1275 -304.97,1136 -264.42,1136 cw(c-264.42,1036) -193.71,1106.71 -140.29,1053.29 ccw(c-69.58,1124) -69.58,1024 43.96,1024 cw(c43.96,965.96) 85,1007 cw(c52.59,974.59) 98.43,974.59 98.43,929.43 ; v1(98.43,480) 98.43,929.43 ; 99,930 98.43,929.43
  Top Layer w8: J1.8@98.43,78.74 v1(98.43,480)
  Bottom Layer w8: -653.32,1505.27 cw(c-588.36,1505.27) Q2.1@-634.29,1551.2 -613.96,1586 ; -650.32,1517.27 -650.32,1482.06 ccw(c-550.32,1482.06) -621.03,1411.35 TP3.1@-615.68,1406 cw(c-615.68,1336) -566.18,1385.5 -494.6,1313.92 cw(c-533.56,1275) v1(-478.49,1275) ; U2.1@-565.92,1886.23 -671.14,1738 -671,1737.86 -671,1721.15 ccw(c-648.74,1721.15) -664.48,1705.41 -653.32,1694.25 -590,1658 -586.91,1654.91 cw(c-596.81,1645) -582.8,1645 -582.8,1644.37 cw(c-607.37,1644.37) -590,1627 -613.96,1586 ; R9.1@-565.36,1555.95 -613.96,1586 ; J1.8@98.43,78.74 v1(98.43,480)
EN: J1.4 R14.2 R15.1 U3.5 | length 2926.6
  Top Layer w6: v1(-677,1300) -677,1324.55 -649.55,1352 -447.08,1352 -286.08,1191 120.13,1191 cw(c120.13,1126.13) 166,1172 cw(c139.44,1145.44) 177,1145.44 177,870.52 177.17,870.35 v1(177.17,480)
  Top Layer w8: J1.4@177.17,78.74 v1(177.17,480)
  Bottom Layer w6: R14.2@-838.76,1265.32 R15.1@-790.88,1265.32 ; v1(-677,1300) -677,1268 -689.76,1255.24 -748.92,1255.24 -755.69,1262 -787.57,1262 R15.1@-790.88,1265.32 ; U3.5@-622.54,1142.14 -762.98,1142.14 -790.88,1170.04 R15.1@-790.88,1265.32
  Bottom Layer w8: J1.4@177.17,78.74 v1(177.17,480)
GND: C2.2 C4.2 C9.2 C10.2 C11.2 C12.2 C13.2 C14.1 C17.1 C18.2 D1.1 D2.1 D3.1 D4.1 J1.1 J1.2 Q1.2 Q2.2 R4.2 R5.2 R9.2 R10.1 R11.1 R12.2 R15.2 U1.2 U2.2 U3.4 U3.20 U3.21 U3.25 U7.2 U7.3 U7.4 U7.6 U7.12 | length 5717.7
  Top Layer w8: J1.2@216.54,78.74 v1(216.54,480) ; J1.1@236.22,78.74 v1(236.22,499.74)
  Top Layer w10: U7.6@452,4330.99 452,4310 441.5,4299.5 U7.4@420.5,4299.5 U7.3@420.5,4268 U7.2@420.5,4236.5 439.49,4236.5 452,4223.99 U7.12@452,4205.01 452,4175.5 v2(456.5,4171)
  Top Layer w15: v1(-391,1153) -391,1111 -310,1030 v1(-245,1030) -245,1029.73 -246,1028.73 -246,992 -220,966 -220,881 v2(-245,856)
  Top Layer w18: v2(-466.69,980.83) -466.69,1081.06 -506.8,1121.17 v3(-506.8,1153.56) v1(-391,1153)
  Bottom Layer w8: J1.2@216.54,78.74 v1(216.54,480) ; J1.1@236.22,78.74 v1(236.22,499.74)
  Bottom Layer w10: R15.2@-790.88,1304.69 -761.57,1334 -677.2,1334 -658.2,1315 -658.2,1308.07 -658,1307.87 -658,1260 -678.75,1239.25 -726.89,1239.25 -734.14,1232 -734.14,1214.11 R11.1@-734.26,1213.99 ; U3.4@-622.54,1122.46 -557.58,1122.46 v3(-547.74,1112.61) U3.25@-537.9,1102.77 ; U3.21@-537.9,1037.81 U3.25@-537.9,1102.77 ; C18.2@-508,979 -508,999.14 -518.21,1009.35 U3.20@-518.21,1037.81 -518.21,1083.09 U3.25@-537.9,1102.77
  Bottom Layer w12: v1(-717,1560) Q2.2@-699.08,1588.61 ; v1(-645,1731) R12.2@-622.84,1716.95 ; v1(-577.27,1936) U2.2@-547.21,1918.62 ; v1(-550,1761) C4.2@-535.21,1784.92 ; R9.2@-545.67,1590.05 v1(-530.09,1617.64) ; v2(-466.69,980.83) -443.12,1004.39 -359.73,1004.39 ; C12.2@-276,1040.56 -265.44,1036.96 v1(-245,1030) C11.2@-220,1018.91 ; v2(456.5,4171) 469.96,4184.46 469.96,4205.51 C13.2@471.69,4207.25 512.54,4166.4 cw(c463.14,4117) 533,4117 cw(c491.96,4117) 520.98,4087.98 v2(520,4087) ; R5.2@796.95,2824.16 v1(817.84,2791) C2.2@831.16,2768.05 ; v1(807.11,3130) R4.2@825.05,3099.84 849.19,3075.7 849.29,3075.7 859.19,3065.8 Q1.2@870.71,3065.8 ; U1.2@985.86,2809.52 v1(1017,2827.11)
  Bottom Layer w15: v1(-787.69,1093.83) -764.28,1117.23 C17.1@-761.42,1117.23 ; v1(-762.98,1218.83) -758.14,1213.99 R11.1@-734.26,1213.99 R10.1@-734.26,1168.99 ; -359.73,1004.39 -327.16,1036.96 C12.2@-265.44,1036.96 ; v2(-245,856) -244.04,856.96 -223.45,856.96 C10.2@-212.97,867.44 ; C10.2@-211,867.44 C10.2@-212.97,867.44 ; C9.2@-152,872.48 -207.93,872.48 C10.2@-212.97,867.44 ; C13.2@471.69,4207.25 ccw(c468.53,4210.41) 473,4210.41 473,4255 476.13,4258.13 ccw(c470.25,4264) C14.1@478.56,4264 ; C14.1@487,4263 513.5,4289.5 v1(514,4289.5)
  Bottom Layer w18: v2(-784,1637.75) Q2.2@-699.08,1588.61 ; v1(-391,1153) -389.29,1154.71 cw(c-318.58,1084) -318.58,1184 305.79,1184 cw(c305.79,1132.79) 342,1169 cw(c311.79,1138.79) 354.51,1138.79 D3.1@354.51,1100.41 ; v1(236.22,499.74) 236.22,841.73 cw(c283.27,841.73) 250,875 cw(c283.8,841.2) 283.8,889 v2(307,889)
  Bottom Layer w25: C18.2@-508,979 -506.17,980.83 v2(-466.69,980.83)
  other v1: -390,1127
  other v2: 759,884 -384,2016.61 1291,2040 1502,2151 -571,2191 -43,2617 -179,2711 787,2950
  other v3: -588.69,1071.67 -506.8,1071.67 -588.69,1153.56
INT: J1.5 U3.7 | length 2520.1
  Top Layer w6: v1(-631,1331) -445.17,1331 -291.17,1177 103.91,1177 cw(c103.91,1127.37) 139,1162.46 cw(c94.38,1117.85) 157.48,1117.85 v1(157.48,499.74)
  Top Layer w8: J1.5@157.48,78.74 v1(157.48,499.74)
  Bottom Layer w6: v1(-631,1331) -640,1322 -640,1217.47 -609.95,1187.42 U3.7@-596.95,1187.42
  Bottom Layer w8: J1.5@157.48,78.74 v1(157.48,499.74)
NetC1_1: C1.1 R1.1 U1.3 | length 108.9
  Bottom Layer w10: U1.3@1004.56,2777.13 C1.1@1037.05,2729.84 R1.1@1064.16,2686.05
NetC1_2: C1.2 U1.4 | length 85.4
  Bottom Layer w10: U1.4@922.73,2729.88 931.4,2729.88 946.23,2715.05 C1.2@1002,2715.05
NetC3_1: C3.1 R7.1 U2.3 | length 117.9
  Bottom Layer w8: U2.3@-535,1958.68 U2.3@-528.51,1951.01
  Bottom Layer w10: U2.3@-535,1958.68 C3.1@-508.05,2005.84 R7.1@-480.84,2051.95
NetC3_2: C3.2 U2.4 | length 93.7
  Bottom Layer w10: C3.2@-473.95,1986.16 -446.68,1958.89 U2.4@-446.68,1903.77
NetC15_1: C15.1 U3.1 | length 90.1
  Bottom Layer w10: C15.1@-636.37,979 -636.37,1009.14 -622.54,1022.97 U3.1@-622.54,1063.4
NetC15_2: C15.2 U3.23 | length 67
  Bottom Layer w8: C15.2@-597,979 -577.27,998.73 U3.23@-577.27,1037.81
NetC16_1: C16.1 U3.2 | length 75.2
  Bottom Layer w10: C16.1@-694.28,1074.67 -685.87,1083.09 U3.2@-622.54,1083.09
NetC16_2: C16.2 U3.24 | length 135.8
  Top Layer w10: v1(-648.57,1035.3) -625.26,1011.99 v1(-596.95,1011.99) v1@-596.95,1008.99
  Bottom Layer w10: C16.2@-694.28,1035.3 v1(-648.57,1035.3) ; v1(-596.95,1011.99) U3.24@-596.95,1037.81
NetC18_1: C18.1 U3.22 | length 61.8
  Bottom Layer w8: U3.22@-557.58,1037.81 -557.58,986.21 C18.1@-550.37,979
NetCRX0_1: CRX0.1 R1.2 | length 269.4
  Top Layer w8: v1(1101,2622) 1174.17,2501.29 CRX0.1@1151.84,2410.24
  Bottom Layer w8: R1.2@1083.84,2651.95 v1(1101,2622)
NetCRX1_1: CRX1.1 R7.2 | length 281.6
  Top Layer w10: v1(-444,2114) CRX1.1@-315.53,2327.08
  Bottom Layer w10: R7.2@-461.16,2086.05 v1(-444,2114)
NetD1_2: D1.2 U3.19 | length 1482.2
  Bottom Layer w8: U3.19@-498.53,1037.81 -356.19,1037.81 -320.49,1073.51 -221.13,1073.51 -195,1047.38 -195,1047.2 -155.42,1007.62 208.38,1007.62 230,986 292,986
  Bottom Layer w15: 292,986 769.65,986 860.04,1076.4 862.01,1076.4 884.04,1098.43 D1.2@884.04,1100.39
NetD2_2: D2.2 U3.18 | length 1105.8
  Bottom Layer w8: U3.18@-472.94,1063.4 -358.6,1063.4 -334,1088 -190,1088 -181,1079 -181,1058 -162,1039 -137,1039 -120,1022 246,1022
  Bottom Layer w15: 246,1022 470.99,1022 525.4,1076.41 527.37,1076.41 549.39,1098.43 D2.2@549.39,1100.4
NetD3_2: D3.2 U3.17 | length 750.5
  Bottom Layer w8: U3.17@-472.94,1083.09 -364.91,1083.09 -342,1106 -179,1106 -164,1091 -164,1064 -154,1054 -130.22,1054 -113.22,1037 114.43,1037 123,1045.57
  Bottom Layer w15: 123,1045.57 164.17,1086.74 D3.2@203.05,1086.74
NetD4_2: D4.2 U3.16 | length 364.4
  Bottom Layer w8: U3.16@-472.94,1102.77 -367.23,1102.77 -348,1122 D4.2@-134.22,1122
  Bottom Layer w10: D4.2@-134.22,1122 D4.2@-130.22,1118
  Bottom Layer w20: D4.2@-130.22,1118 D4.2@-121.67,1109.46
NetD5_1: D5.1 R6.2 | length 818.2
  Bottom Layer w10: R6.2@-702.16,1696.13 -702.16,1729.84 -702,1730 -615.68,1853 -612,1886 -591.82,1963.83 -627,2023.63 -515,2216 D5.1@-302.8,2300.5
NetD6_1: D6.1 R2.2 | length 822.3
  Bottom Layer w12: R2.2@954.48,2915.95 1118.92,2805 1338.48,2433.56 1322.05,2369.65 D6.1@1213.22,2305.31
NetJ1_11: J1.11 L2.1 TP13.1 | length 997.2
  Top Layer w8: J1.11@39.37,78.74 v1(39.37,500)
  Bottom Layer w8: J1.11@39.37,78.74 v1(39.37,500) 39.37,500.37 57,518 57,571 56,570
  Bottom Layer w15: L2.1@64,894.47 TP13.1@139,895
NetJ1_12: J1.12 L1.1 | length 885.5
  Top Layer w8: J1.12@19.68,78.74 v1(19.68,481)
  Bottom Layer w8: J1.12@19.68,78.74 v1(19.68,481) 19.68,562
NetQ1_3: Q1.3 R2.1 | length 64
  Bottom Layer w15: Q1.3@877.69,2978.9 R2.1@934.8,2950.05
NetQ2_3: Q2.3 R6.1 | length 100.9
  Bottom Layer w12: R6.1@-721.84,1662.03 ccw(c-664.06,1719.82) -664.06,1638.1 Q2.3@-627.31,1638.1
NetR3_1: R3.1 R5.1 U1.6 | length 137.2
  Bottom Layer w12: R3.1@805.16,2885.84 R5.1@831.05,2843.84 874.32,2800.57 874.32,2794.61 870.71,2791 876.48,2791 ccw(c876.48,2803.51) U1.6@885.33,2794.66
NetR8_1: R8.1 R12.1 U2.6 | length 205
  Bottom Layer w8: R12.1@-603.06,1750.99 -594.1,1752.69 -548,1820.34 cw(c-502.98,1775.31) -502.98,1838.99 U2.6@-484.09,1838.99
  Bottom Layer w12: R12.1@-603.06,1750.99 R8.1@-564.17,1728.05
NetR10_2: R10.2 U3.6 | length 75.6
  Bottom Layer w8: R10.2@-694,1171.83 -665.41,1171.83 -655.41,1161.83 U3.6@-622.54,1161.83
NetR11_2: R11.2 U3.10 | length 186.4
  Top Layer w6: v1(-665.57,1213.74) -664.83,1212.99 v1@-538.9,1212.99
  Top Layer w8: v1@-538.9,1212.99 v1(-537.9,1213.99)
  Bottom Layer w6: U3.10@-537.9,1187.42 v1(-537.9,1213.99)
  Bottom Layer w8: R11.2@-694.89,1213.99 -665.83,1213.99 v1(-665.57,1213.74) ; v1(-537.9,1213.99) v1@-537.9,1215.99